# Allegro board filterboardbendy.brd
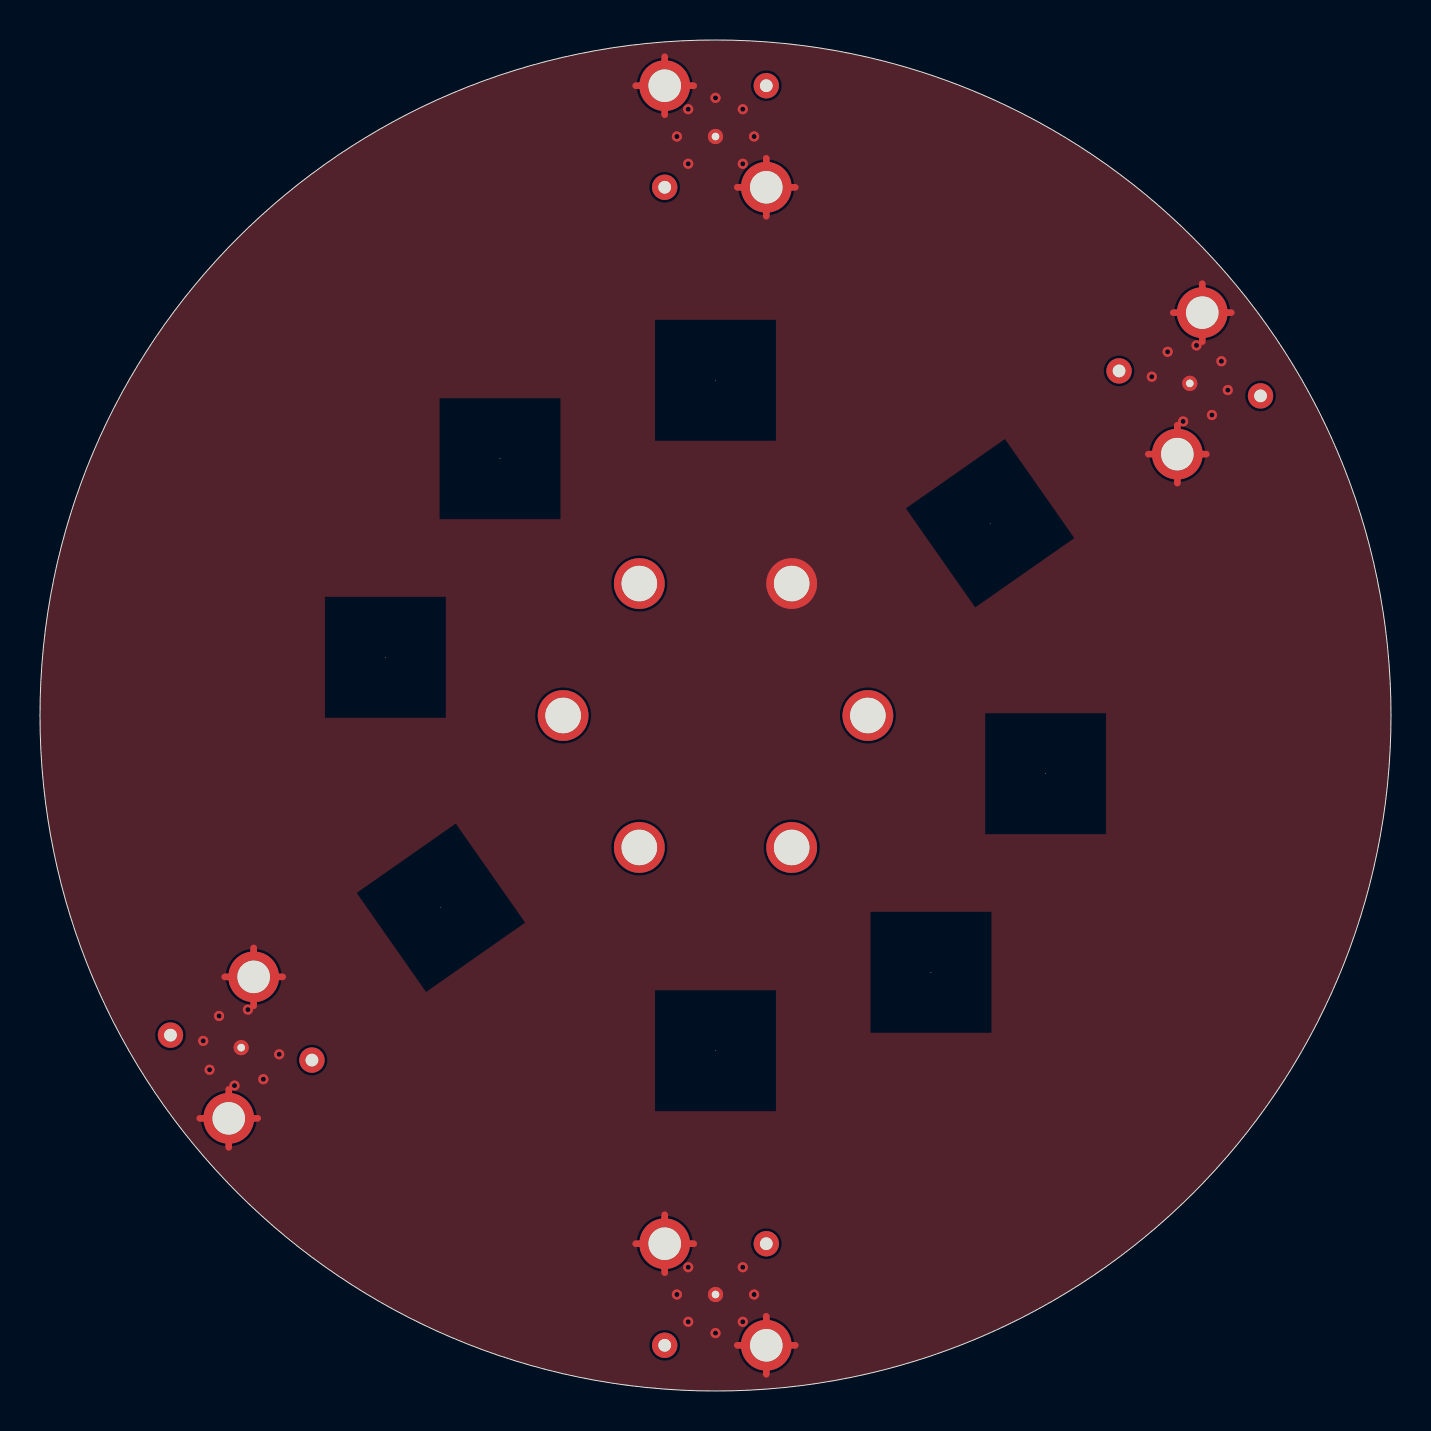
[diagram p0: board, top side]
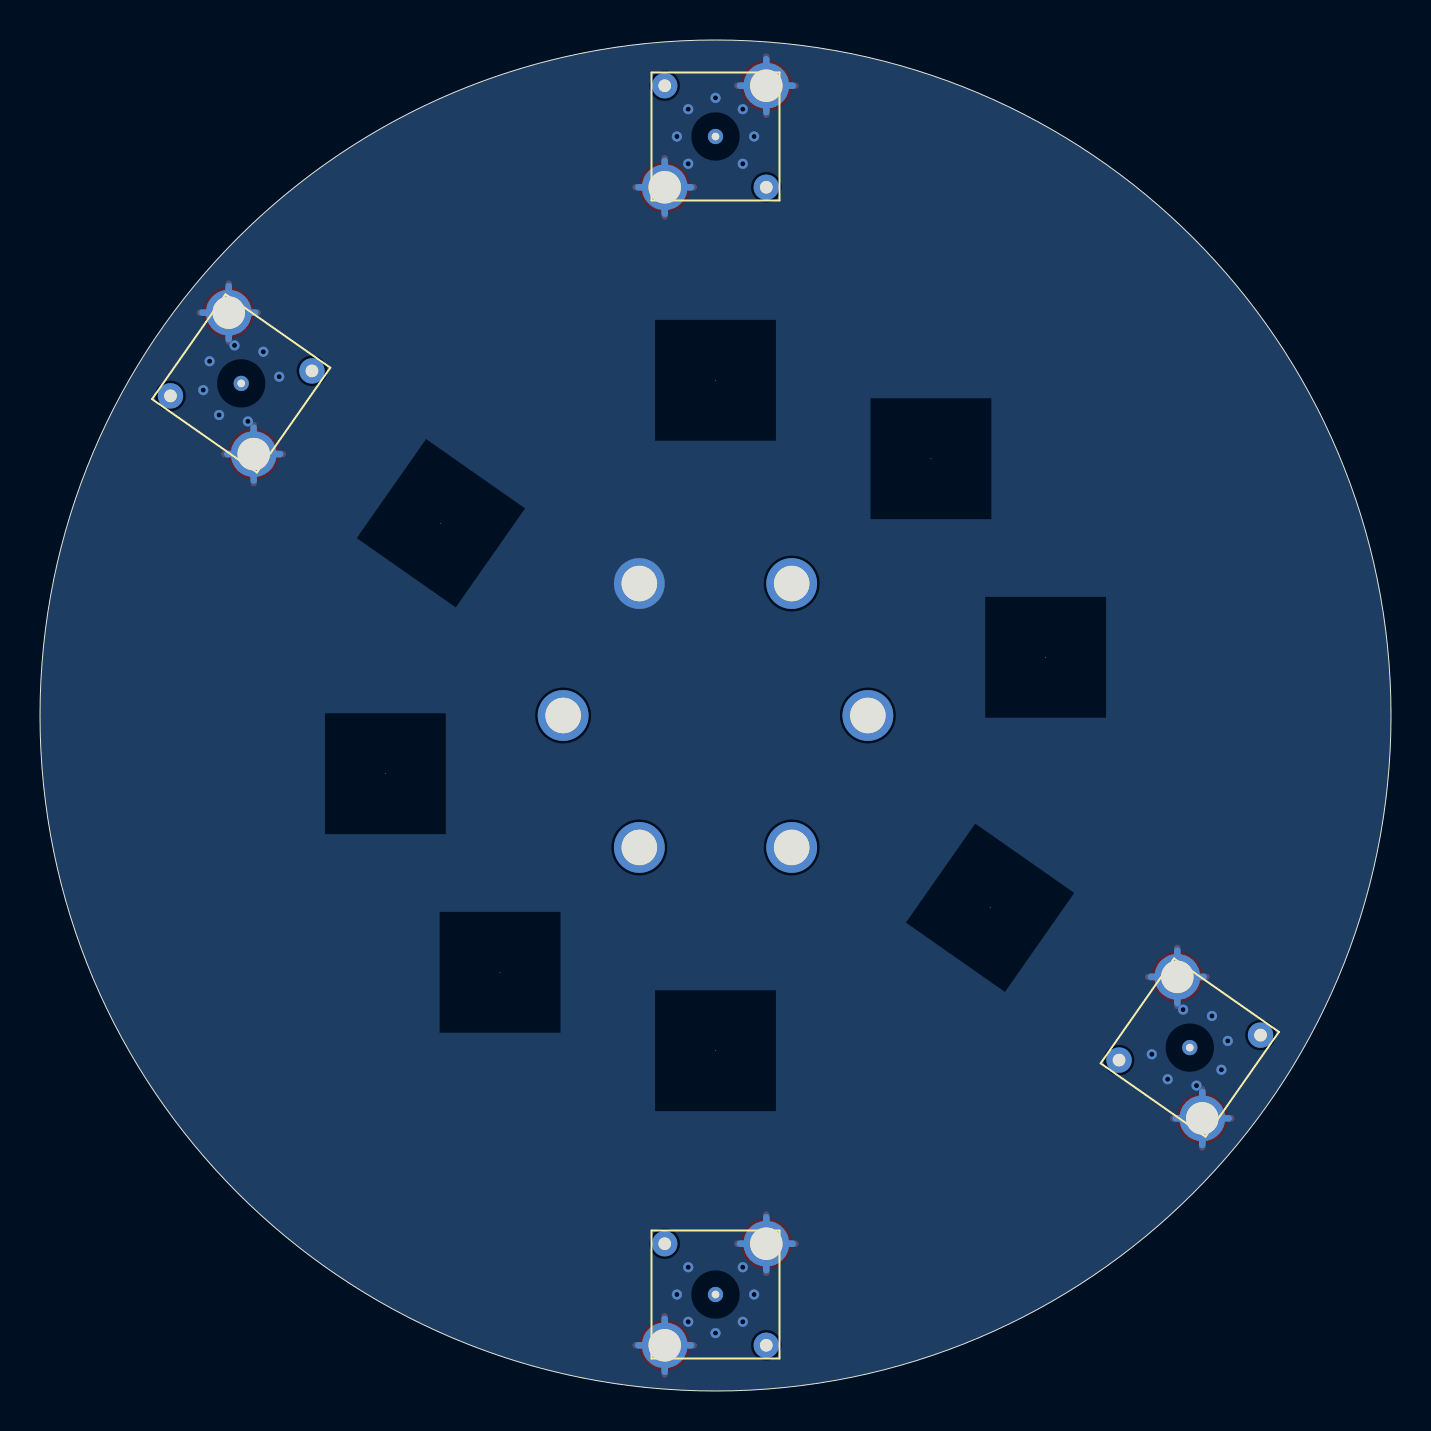
[diagram p1: board, bottom side, seen from below]

Outline 67.56 x 67.56 mm; copper layers: TOP, 02_GND, 03_SIG, BOTTOM. Coordinates in mm from the lower left corner of the outline.
Outline path: circle c33.78,33.78 r33.78

## Placement (name value [footprint] x y rotation side)
J3  -  [SSMA_BB]  33.78 4.83 90 bottom
J4  -  [SSMA_BB]  10.06 17.17 35 bottom
J7  -  [SSMA_BB]  33.78 62.74 270 bottom
J8  -  [SSMA_BB]  57.5 50.39 215 bottom
MTG1  -  [HOLE070P]  37.59 40.38 0 top
NOREF  -  [unnamed]  41.4 33.78 300 top
NOREF#2  -  [unnamed]  29.97 27.18 180 top
NOREF#3  -  [unnamed]  37.59 27.18 240 top
NOREF#4  -  [unnamed]  26.16 33.78 120 top
NOREF#5  -  [unnamed]  29.97 40.38 60 top
R1  -  [FILTER]  50.29 30.87 0 top
R2  -  [FILTER]  44.56 20.94 0 top
R3  -  [FILTER]  33.78 17.02 270 top
R4  -  [FILTER]  20.05 24.17 215 top
R5  -  [FILTER]  17.27 36.69 0 top
R6  -  [FILTER]  23.01 46.62 0 top
R7  -  [FILTER]  33.78 50.55 90 top
R8  -  [FILTER]  47.51 43.4 35 top

## Library data of the parts
J3 J4 J7 J8 = SSMA_BB
MTG1 = HOLE070P
R1-R8 = FILTER

## Footprints (pads in the part's own frame, mm; a bottom-side part is the same pattern mirrored in y, then rotated)
FILTER
  round 0.025 hole 5.994 unplated: (0,0)
HOLE070P
  round 2.54 hole 1.778: 1(0,0)
SSMA_BB
  round 1.27 hole 0.635: (-2.54,-2.54) (2.54,2.54)
  round 0.762 hole 0.381: 1(0,0)
  round 2.54 hole 1.626: 2(-2.54,2.54) 3(2.54,-2.54)
unnamed
  round 2.54 hole 1.778: 1(0,0)

## Nets
GND: J3.2(TP-2) J3.3(TP-3) J4.2(TP-2) J4.3(TP-3) J7.2(TP-2) J7.3(TP-3) J8.2(TP-2) J8.3(TP-3) MTG1.1(TP-1)
MICROWAVE: J3.1(TP-1) J4.1(TP-1) J7.1(TP-1) J8.1(TP-1)

Pads without a net: NOREF 1; NOREF#2 1; NOREF#3 1; NOREF#4 1; NOREF#5 1

## Via types
v1: diameter 0.508, hole 0.254, TOP to BOTTOM, 28 vias

## Routing (per net, layer and track width the routed paths; a pad name or vN(x,y) marks a point on that pad's centre or on a via; arc(x,y) is an arc through that point)
GND: length 155.3
  TOP w0.33: 9.44,12.19 J4.2 ; J4.2 7.99,13.64 ; J4.2 9.44,15.08 ; J4.2 10.89,13.64 ; 36.32,58.75 J7.3 ; J7.3 36.32,61.65 ; J7.3 37.77,60.2 ; J7.3 34.87,60.2 ; J8.2 58.13,55.38 ; J8.2 58.13,52.48 ; J8.2 56.68,53.93 ; J8.2 59.57,53.93 ; J7.2 31.24,66.73 ; J7.2 32.69,65.28 ; J7.2 29.79,65.28 ; J7.2 31.24,63.83 ; 9.24,20.71 J4.3 ; J4.3 10.69,22.16 ; J4.3 10.69,19.26 ; J4.3 12.13,20.71 ; J3.3 32.69,7.37 ; J3.3 31.24,8.81 ; J3.3 31.24,5.92 ; J3.3 29.79,7.37 ; J3.2 37.77,2.29 ; J3.2 36.32,0.84 ; J3.2 36.32,3.73 ; J3.2 34.87,2.29 ; 56.88,45.4 J8.3 ; J8.3 56.88,48.3 ; J8.3 58.33,46.85 ; J8.3 55.43,46.85
  03_SIG w0.33: 35,2.29 J3.2 ; J3.2 37.64,2.29 ; J3.2 36.32,3.61 ; J3.2 36.32,0.96 ; J4.2 10.76,13.64 ; J4.2 9.44,14.96 ; J4.2 8.12,13.64 ; J4.2 9.44,12.31 ; J7.2 31.24,66.6 ; J7.2 31.24,63.96 ; J7.2 32.56,65.28 ; J7.2 29.92,65.28 ; 31.24,6.04 J3.3 ; J3.3 29.92,7.37 ; J3.3 32.56,7.37 ; J3.3 31.24,8.69 ; 56.88,45.53 J8.3 ; J8.3 55.56,46.85 ; J8.3 58.2,46.85 ; J8.3 56.88,48.17 ; J8.2 58.13,55.25 ; J8.2 59.45,53.93 ; J8.2 56.8,53.93 ; J8.2 58.13,52.61 ; 9.37,20.71 J4.3 ; J4.3 12.01,20.71 ; J4.3 10.69,19.39 ; J4.3 10.69,22.03 ; 35,60.2 J7.3 ; J7.3 36.32,61.52 ; J7.3 36.32,58.88 ; J7.3 37.64,60.2 ; 50.55,33.78 62.74,33.78 ; 47.51,24.17 57.5,17.17
  BOTTOM w0.33: 31.24,63.96 J7.2 ; J7.2 32.56,65.28 ; J7.2 29.92,65.28 ; J7.2 31.24,66.6 ; 31.24,6.04 J3.3 ; J3.3 31.24,8.69 ; J3.3 32.56,7.37 ; J3.3 29.92,7.37 ; 10.69,19.39 J4.3 ; J4.3 12.01,20.71 ; J4.3 10.69,22.03 ; J4.3 9.37,20.71 ; 35,60.2 J7.3 ; J7.3 36.32,61.52 ; J7.3 37.64,60.2 ; J7.3 36.32,58.88 ; J8.2 59.45,53.93 ; J8.2 58.13,52.61 ; J8.2 58.13,55.25 ; J8.2 56.8,53.93 ; J8.3 56.88,48.17 ; J8.3 58.2,46.85 ; J8.3 56.88,45.53 ; J8.3 55.56,46.85 ; 8.12,13.64 J4.2 ; J4.2 9.44,12.31 ; J4.2 9.44,14.96 ; J4.2 10.76,13.64 ; 35,2.29 J3.2 ; J3.2 36.32,3.61 ; J3.2 36.32,0.96 ; J3.2 37.64,2.29
  vias: v1(8.16,17.51) v1(8.48,16.07) v1(8.96,18.75) v1(9.73,15.27) v1(10.4,19.07) v1(11.17,15.59) v1(11.96,16.84) v1(31.85,62.74) v1(31.85,4.83) v1(32.42,64.1) v1(32.42,61.37) v1(32.42,6.19) v1(32.42,3.46) v1(33.78,64.67) v1(33.78,2.9) v1(35.15,64.1) v1(35.15,61.37) v1(35.15,6.19) v1(35.15,3.46) v1(35.71,62.74) v1(35.71,4.83) v1(55.6,50.73) v1(56.39,51.97) v1(57.17,48.49) v1(57.84,52.29) v1(58.61,48.81) v1(59.08,51.5) v1(59.4,50.06)
MICROWAVE: length 183.7
  03_SIG w0.33: J3.1 33.78,32 ; 33.78,32 33.78,33.78 ; 33.78,32 arc(41.42,28.66) 44.56,20.94 ; J8.1 47.51,43.4 33.78,33.78 ; 33.78,35.56 J7.1 ; 33.78,35.56 33.78,33.78 ; 33.78,35.56 arc(26.15,38.9) 23.01,46.62 ; 33.78,33.78 20.05,24.17 J4.1 ; 33.78,33.78 arc(41.91,31.6) 50.29,30.87 ; 33.78,33.78 arc(25.65,35.96) 17.27,36.69

## Copper pours and planes (outline as drawn; the poured copper is in the pictures)
GND on TOP, BOTTOM, 02_GND, 03_SIG: 0,33.78 67.56,33.78
